# EAGLE board VDC (EAGLE 6.3)
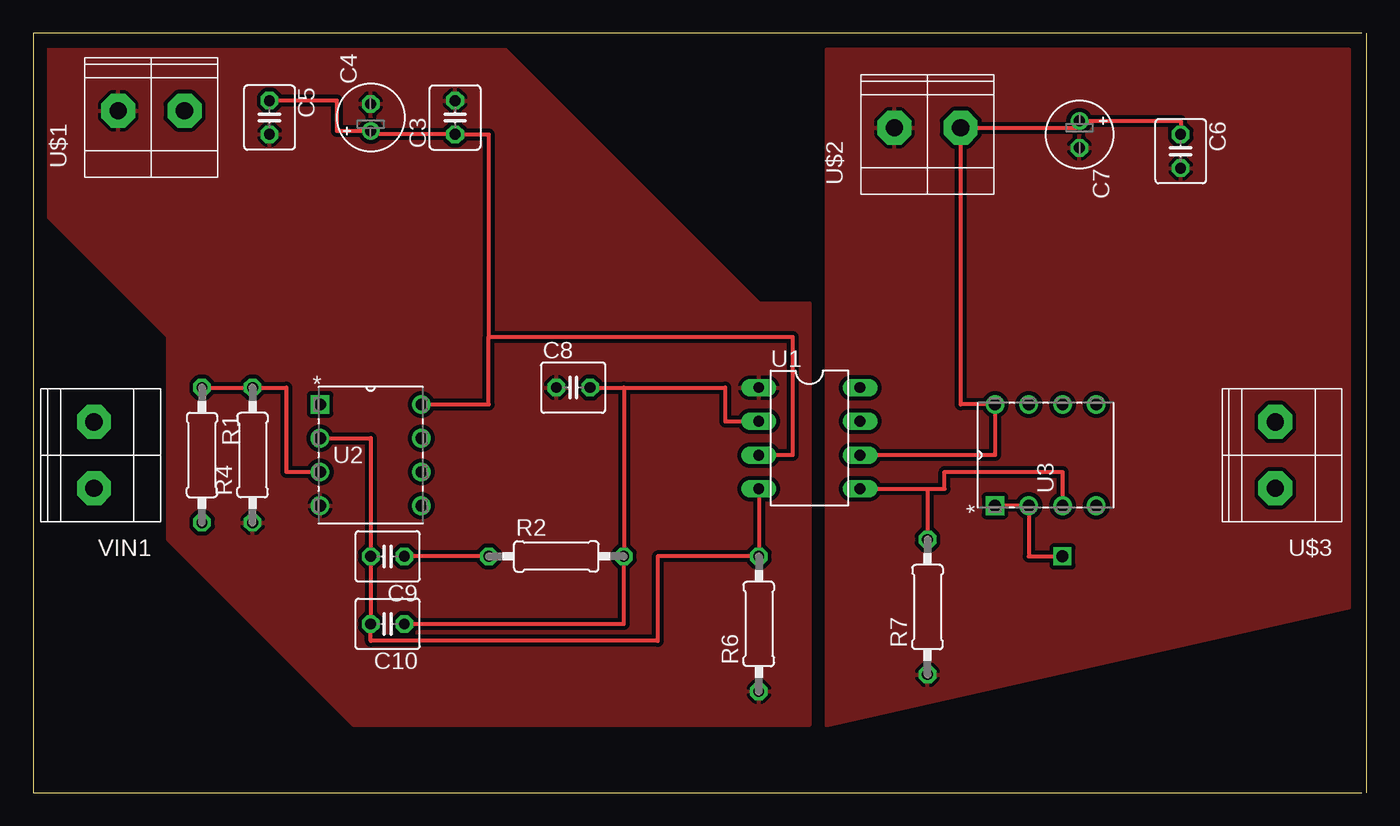
[diagram p0: board, top side]
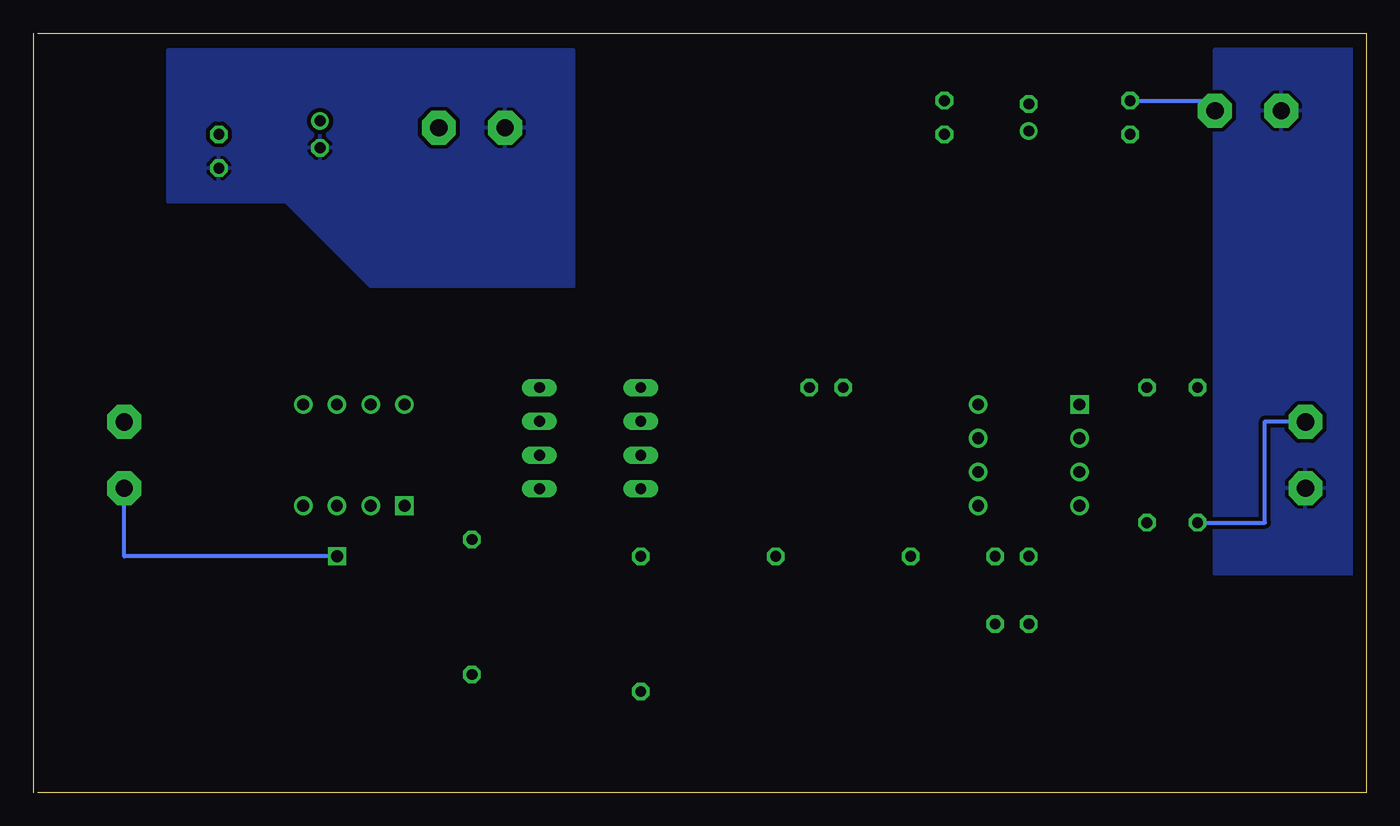
[diagram p1: board, bottom side, seen from below]

Size 100.33 x 57.14 mm. Coordinates in mm from the lower left corner, seen from the top.
Outline: 100,0 0,0 0,57.14 100,57.14
Outline: 100.33,57.14 100.33,0
Copper layers (1*16): Top 0.035mm / dielectric 1.5mm / Bottom 0.035mm
Design rules "default *": minimum track width 10mil, minimum drill 24mil, track to track 12mil, track to pad 12mil, pad to pad 12mil, via to via 12mil, smd to smd 12mil, copper to edge 40mil, drill to drill 8mil, minimum pad ring 10mil, minimum via ring 8mil, stop-mask expansion 4mil, vias tented up to drill 0mil, thermal gap 10mil

## Footprints (pad centres in the part's own frame; a part is rotated, then mirrored left to right if it is on the bottom)
C025-040X050 = drill 0.813 octagon: 1 -1.27,0; 2 1.27,0
E2-5 = drill 0.813 pad 1.27: + -1.016,0 | drill 0.813 pad 1.27 octagon: - 1.016,0
0207/10 = drill 0.813 octagon: 1 -5.08,0; 2 5.08,0
DIL08 = drill 0.813 long: 1 -3.81,-3.81; 2 -1.27,-3.81; 3 1.27,-3.81; 4 3.81,-3.81; 5 3.81,3.81; 6 1.27,3.81; 7 -1.27,3.81; 8 -3.81,3.81
DIP254P762X508-8P = drill 0.889 square: 1 -7.62,7.62 | drill 0.889: 2 -7.62,5.08; 3 -7.62,2.54; 4 -7.62,0; 5 0,0; 6 0,2.54; 7 0,5.08; 8 0,7.62
CTB1500-2 = drill 1.3 pad 2.54 octagon: P$1 -2.5,0.5; P$2 2.5,0.5

## Placement (x,y rotation side)
C3  [C025-040X050]  31.75,50.8 90 top
C4  [E2-5]  25.4,50.8 90 top
C5  [C025-040X050]  17.78,50.8 270 top
C6  [C025-040X050]  86.36,48.26 270 top
C7  [E2-5]  78.74,49.53 270 top
C8  [C025-040X050]  40.64,30.48 0 top
C9  [C025-040X050]  26.67,17.78 180 top
C10  [C025-040X050]  26.67,12.7 180 top
R1  [0207/10]  12.7,25.4 270 top
R2  [0207/10]  39.37,17.78 0 top
R4  [0207/10]  16.51,25.4 90 top
R6  [0207/10]  54.61,12.7 90 top
R7  [0207/10]  67.31,13.97 90 top
U1  IL300  [DIL08]  58.42,26.67 270 top
U2  MCP602-E/P  [DIP254P762X508-8P]  29.21,21.59 0 top
U3  MCP602-E/P  [DIP254P762X508-8P]  80.01,29.21 90 top
U$1  CTB1500/2  [CTB1500-2]  8.89,50.8 0 top
U$2  CTB1500/2  [CTB1500-2]  67.31,49.53 0 top
U$3  CTB1500/2  [CTB1500-2]  93.98,25.4 90 top
VIN1  CTB1500/2  [CTB1500-2]  5.08,25.4 90 top

## Library data of the parts
C3-C10 R1 R2 R4 R6 R7 = resistor
U1 = ic-optoisolator
U2 U3 = MCP; MPN: MCP602-E/P; OC_FARNELL: 1852042; OC_NEWARK: 88H9870; PACKAGE: DIP-8; SUPPLIER: Microchip
U$1-U$3 VIN1 = eko-parts

## Nets
+5V/1: C3.1 C4.+ C5.1 U1.3 U2.8 U$1.P$2
+5V/2: C6.1 C7.+ U1.6 U3.8 U$2.P$2
DC_OUT: U3.1 U3.2 U$3.P$1
DC_SENSE: R1.2 VIN1.P$2
GND1: C3.2 C4.- C5.2 C8.1 R4.1 R6.1 U1.1 U2.4 U$1.P$1 VIN1.P$1
GND2: C6.2 C7.- R7.1 U$2.P$1
N$1: C9.2 C10.2 R6.2 U1.4 U2.2
N$3: R7.2 U1.5 U3.3
N$4: C8.2 C10.1 R2.2 U1.2
N$5: C9.1 R2.1
N$8: R1.1 R4.2 U2.3
VSS: U3.4

## Tracks (layer width: path | path; a pad name or v marks a point on that pad's centre or on a via)
+5V/1
  Top 0.305: U2.8 34.29,29.21 34.29,34.29 | 34.29,34.29 57.15,34.29 57.15,25.4 U1.3 | 34.29,34.29 34.29,49.53 C3.1 25.4,49.53 C4.+ 22.86,49.78 22.86,52.07 C5.1
  Bottom 0.305: C5.1 11.39,52.07 U$1.P$2
+5V/2
  Top 0.305: U1.6 72.39,25.4 U3.8 69.81,29.21 U$2.P$2 78.74,50.03 C7.+ 86.36,50.55 C6.1
DC_OUT  (via drill 0.9)
  Top 0.305: U3.1 U3.2 74.93,17.78 v77.47,17.78
  Bottom 0.305: v77.47,17.78 93.48,17.78 U$3.P$1
DC_SENSE
  Bottom 0.305: R1.2 7.62,20.32 7.62,27.94 4.58,27.94 VIN1.P$2
GND1
  pour Bottom: 0,55.88 11.43,55.88 11.43,16.51 0,16.51
  pour Top: 0,55.88 35.56,55.88 54.61,36.83 58.42,36.83 58.42,5.08 24.13,5.08 10.16,19.05 10.16,34.29 0,44.45
GND2
  pour Bottom: 59.69,55.88 59.69,38.1 74.93,38.1 81.28,44.45 90.17,44.45 90.17,55.88
  pour Top: 59.69,55.88 59.69,5.08 99.06,13.97 99.06,55.88
N$1
  Top 0.305: U2.2 25.4,26.67 C9.2 C10.2 25.4,11.43 46.99,11.43 46.99,17.78 R6.2 U1.4
N$3
  Top 0.305: U1.5 67.31,22.86 | 67.31,22.86 R7.2 | 67.31,22.86 68.58,22.86 68.58,24.13 77.47,24.13 U3.3
N$4
  Top 0.305: C10.1 44.45,12.7 R2.2 44.45,30.48 C8.2 52.07,30.48 52.07,27.94 U1.2
N$5
  Top 0.305: R2.1 C9.1
N$8
  Top 0.305: R1.1 R4.2 19.05,30.48 19.05,24.13 U2.3